# Altium PCB board.PcbDoc (part 2 of 2)
Units mm, origin at the board's own origin, x right, y up, seen from the top; angles counter-clockwise.
Board outline 58 x 79 mm, 2 copper layers (Top Layer, Bottom Layer), stack 0.97 mm thick; 224 components, 193 nets, 673 pads, 83 vias.
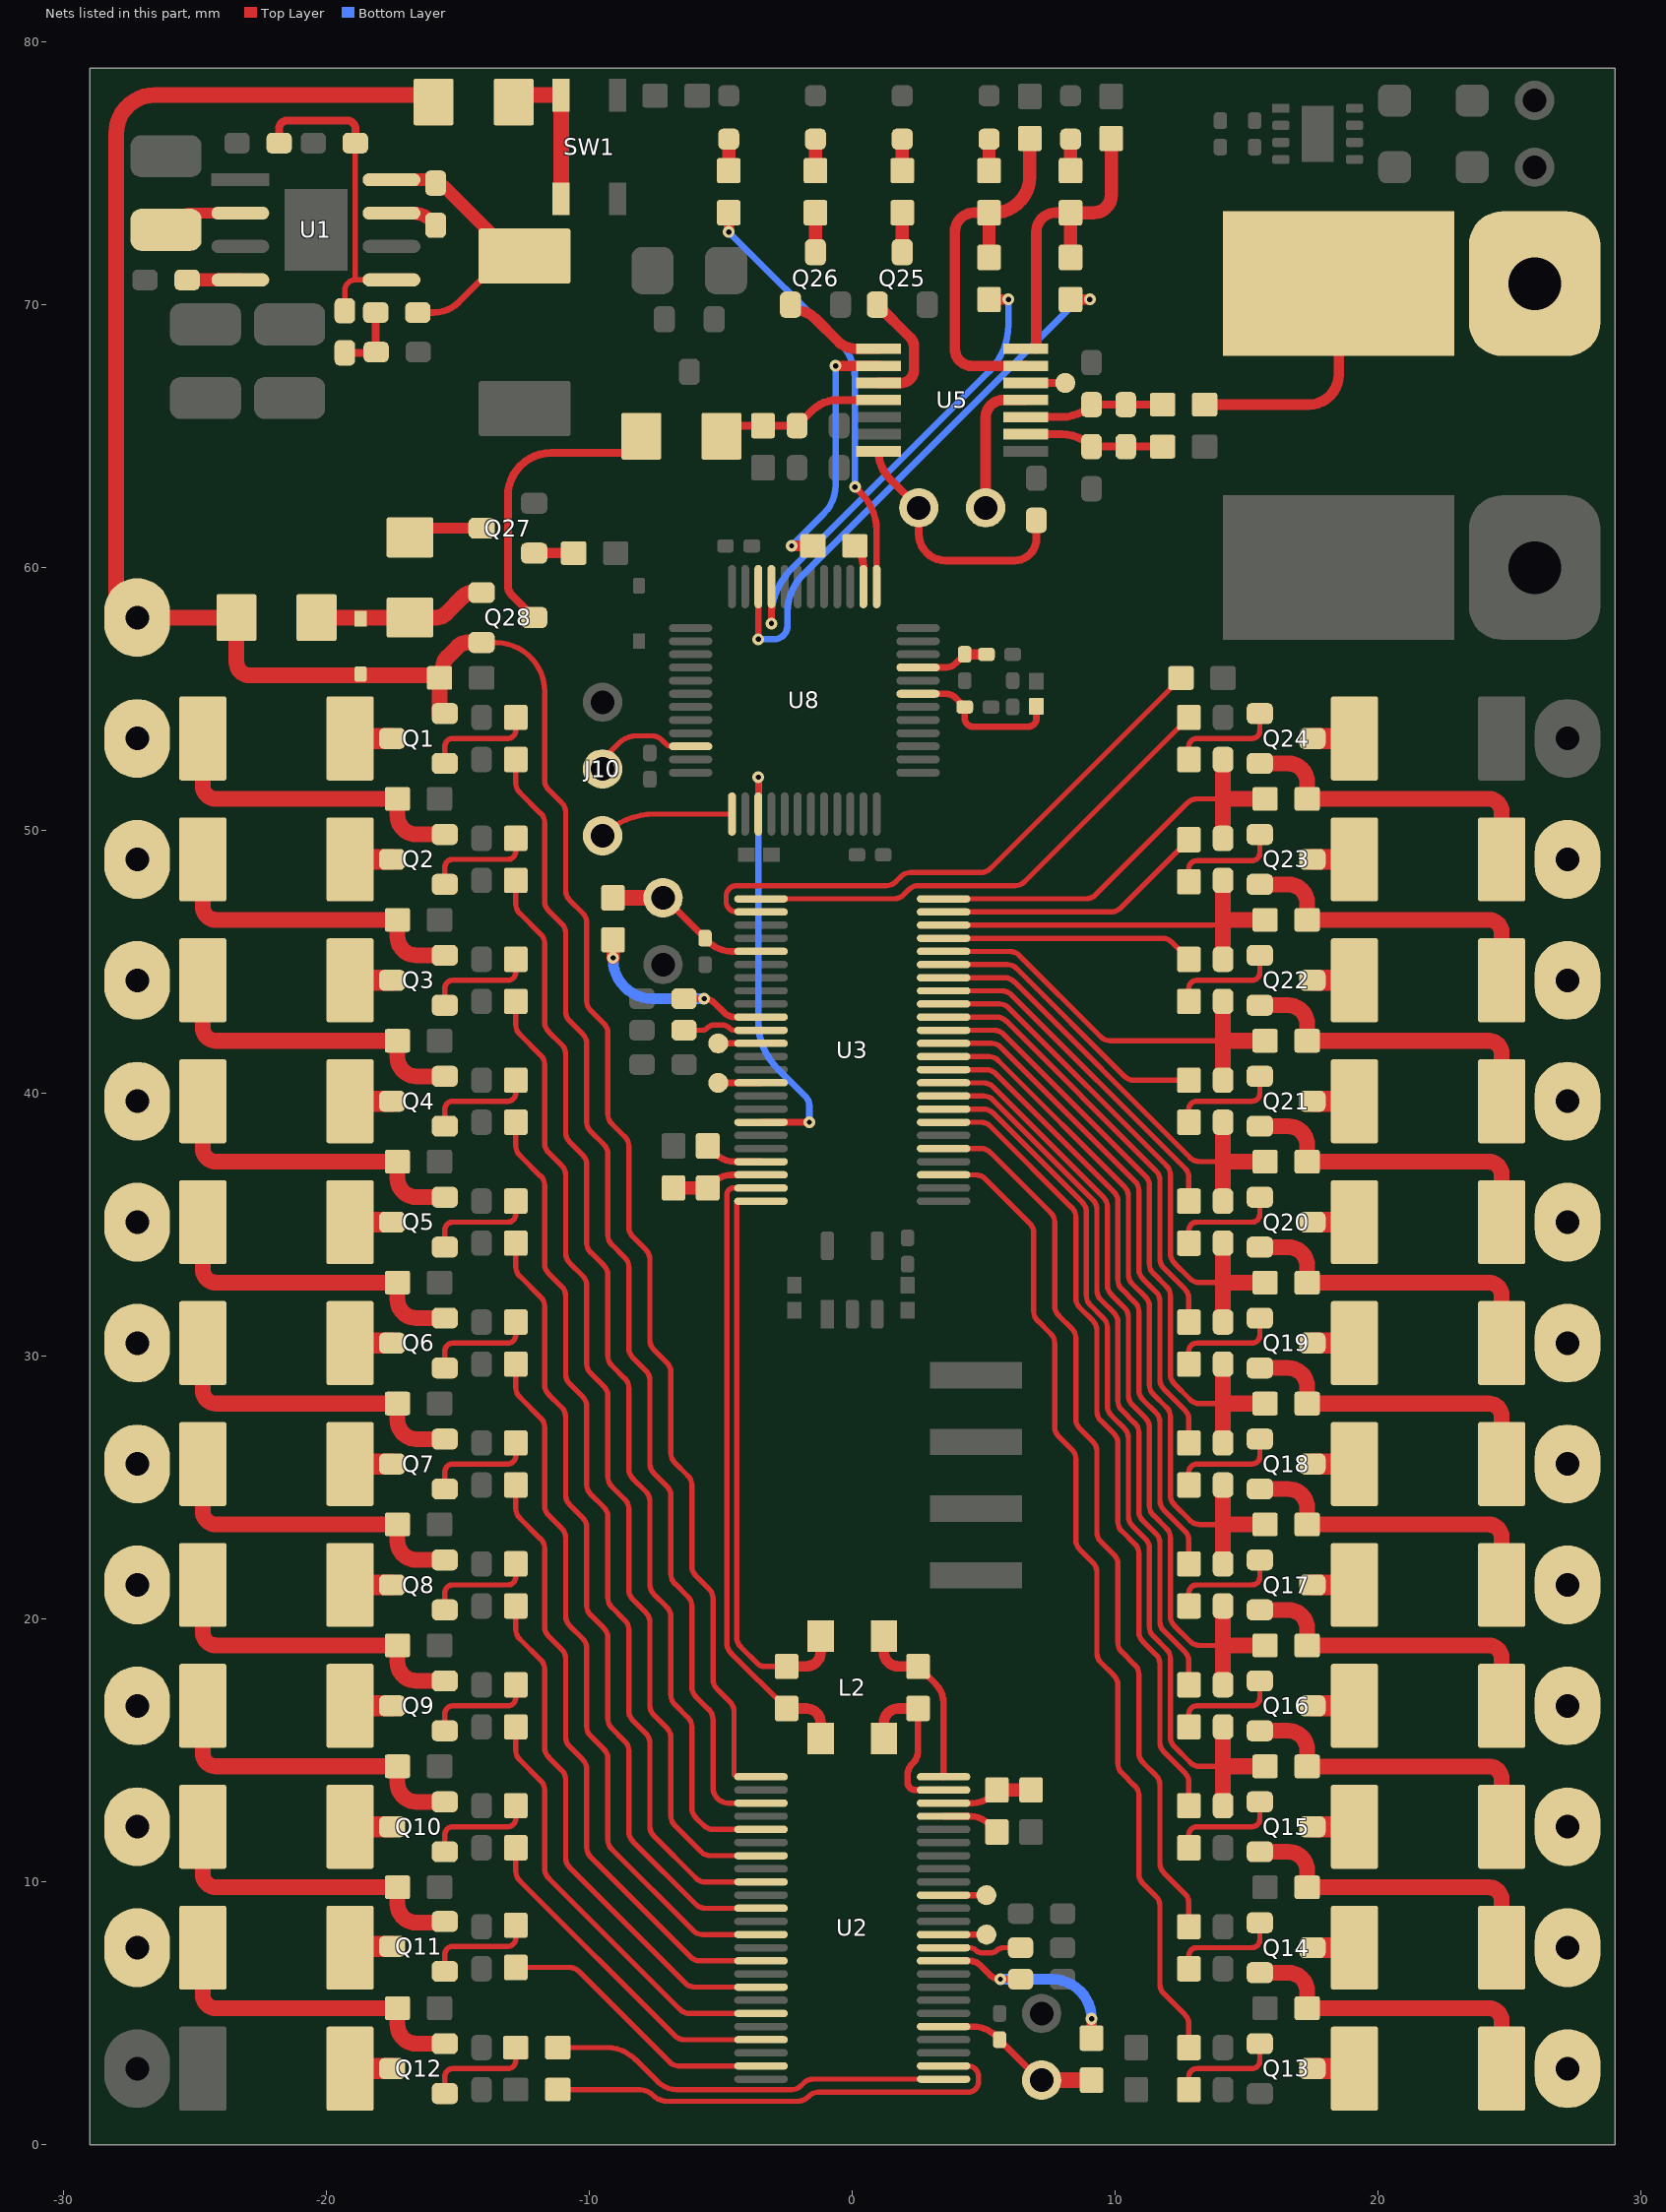
[diagram p2: the nets of this part, all layers, seen from the top]

## Via types
v1: diameter 0.45, hole 0.2, Top Layer to Bottom Layer, tented both sides, 59 vias
v2: diameter 0.6, hole 0.3, Top Layer to Bottom Layer, tented both sides, 24 vias

## Nets (pads, with @x,y where several pads share a name; then routed paths per layer and width w, separated by ;. In a path a pad name is that pad's centre, name@x,y a point inside that pad or via, vN(x,y) a via of type N, cw(c..) or ccw(c..) an arc to the next point about the centre after c; other vN are vias at no path point) (continued)
NetC16_1: C16.1 C17.2 R41.2 U3.8 | length 35.4
  Top Layer w0.2: U3.8@3.47,39.4 4.99,39.4 cw(c4.99,38.892) 5.349,39.251 8.751,35.849 cw(c8.392,35.49) 8.9,35.49 8.9,32.31 ccw(c9.408,32.31) 9.049,31.951 9.551,31.449 cw(c9.192,31.09) 9.7,31.09 ; 9.7,31.09 9.7,28.11 ccw(c10.208,28.11) 9.849,27.751 10.351,27.249 cw(c9.992,26.89) 10.5,26.89 10.5,23.91 ccw(c11.008,23.91) 10.649,23.551 11.151,23.049 cw(c10.792,22.69) 11.3,22.69 11.3,19.71 ccw(c11.808,19.71) 11.449,19.351 11.951,18.849 cw(c11.592,18.49) 12.1,18.49 12.1,15.51 ccw(c12.608,15.51) 12.249,15.151 12.851,14.549 ccw(c13.21,14.908) 13.21,14.4 14.1,14.4
  Top Layer w0.6: C16.1@14.1,12.9 14.1,14.4 ; C17.2@14.1,15.9 14.1,14.4 ; R41.2@15.7,14.4 14.1,14.4
NetC17_1: C17.1 C18.2 R42.2 U3.10 | length 31.8
  Top Layer w0.2: U3.10@3.47,40.4 4.99,40.4 cw(c4.99,39.892) 5.349,40.251 9.551,36.049 cw(c9.192,35.69) 9.7,35.69 ; 9.7,35.69 9.7,32.71 ccw(c10.208,32.71) 9.849,32.351 10.351,31.849 cw(c9.992,31.49) 10.5,31.49 10.5,28.51 ccw(c11.008,28.51) 10.649,28.151 11.151,27.649 cw(c10.792,27.29) 11.3,27.29 11.3,24.31 ccw(c11.808,24.31) 11.449,23.951 11.951,23.449 cw(c11.592,23.09) 12.1,23.09 12.1,20.11 ccw(c12.608,20.11) 12.249,19.751 12.851,19.149 ccw(c13.21,19.508) 13.21,19 14.1,19
  Top Layer w0.6: C17.1@14.1,17.5 14.1,19 ; C18.2@14.1,20.5 14.1,19 ; R42.2@15.7,19 14.1,19
NetC18_1: C18.1 C19.2 R43.2 U3.12 | length 28.4
  Top Layer w0.2: U3.12@3.47,41.4 5.19,41.4 cw(c5.19,40.892) 5.549,41.251 10.351,36.449 cw(c9.992,36.09) 10.5,36.09 10.5,33.11 ccw(c11.008,33.11) 10.649,32.751 11.151,32.249 cw(c10.792,31.89) 11.3,31.89 11.3,28.91 ccw(c11.808,28.91) 11.449,28.551 11.951,28.049 cw(c11.592,27.69) 12.1,27.69 12.1,24.71 ccw(c12.608,24.71) 12.249,24.351 12.851,23.749 ccw(c13.21,24.108) 13.21,23.6 14.1,23.6
  Top Layer w0.6: C18.1@14.1,22.1 14.1,23.6 ; C19.2@14.1,25.1 14.1,23.6 ; R43.2@15.7,23.6 14.1,23.6
NetC19_1: C19.1 C20.2 R44.2 U3.14 | length 25
  Top Layer w0.2: U3.14@3.47,42.4 5.39,42.4 cw(c5.39,41.892) 5.749,42.251 11.151,36.849 cw(c10.792,36.49) 11.3,36.49 11.3,33.51 ccw(c11.808,33.51) 11.449,33.151 11.951,32.649 cw(c11.592,32.29) 12.1,32.29 12.1,29.31 ccw(c12.608,29.31) 12.249,28.951 12.851,28.349 ccw(c13.21,28.708) 13.21,28.2 14.1,28.2
  Top Layer w0.6: C19.1@14.1,26.7 14.1,28.2 R44.2@15.7,28.2 ; 14.1,28.2 C20.2@14.1,29.7
NetC20_1: C20.1 C21.2 R45.2 U3.16 | length 21.5
  Top Layer w0.2: U3.16@3.47,43.4 5.59,43.4 cw(c5.59,42.892) 5.949,43.251 11.951,37.249 cw(c11.592,36.89) 12.1,36.89 12.1,33.91 ccw(c12.608,33.91) 12.249,33.551 12.851,32.949 ccw(c13.21,33.308) 13.21,32.8 14.1,32.8
  Top Layer w0.6: C20.1@14.1,31.3 14.1,32.8 ; C21.2@14.1,34.3 14.1,32.8 ; R45.2@15.7,32.8 14.1,32.8
NetC21_1: C21.1 C22.2 R46.2 U3.18 | length 18.1
  Top Layer w0.2: U3.18@3.47,44.4 5.79,44.4 cw(c5.79,43.892) 6.149,44.251 12.851,37.549 ccw(c13.21,37.908) 13.21,37.4 14.1,37.4
  Top Layer w0.6: C21.1@14.1,35.9 14.1,37.4 ; C22.2@14.1,38.9 14.1,37.4 ; R46.2@15.7,37.4 14.1,37.4
NetC22_1: C22.1 C23.2 R47.2 U3.20 | length 16.6
  Top Layer w0.2: U3.20@3.47,45.4 5.99,45.4 cw(c5.99,44.892) 6.349,45.251 9.451,42.149 ccw(c9.81,42.508) 9.81,42 14.1,42
  Top Layer w0.6: C22.1@14.1,40.5 14.1,42 ; C23.2@14.1,43.5 14.1,42 ; R47.2@15.7,42 14.1,42
NetC23_1: C23.1 C24.2 R48.2 U3.22 | length 15.2
  Top Layer w0.2: U3.22@3.47,46.4 13.69,46.4 ccw(c13.69,46.908) 14.049,46.549
  Top Layer w0.6: C23.1@14.1,45.1 14.1,46.6 ; C24.2@14.1,48.1 14.1,46.6 ; R48.2@15.7,46.6 14.1,46.6
NetC24_1: C24.1 C25.2 R49.2 U3.24 | length 16.8
  Top Layer w0.2: U3.24@3.47,47.4 8.89,47.4 ccw(c8.89,47.908) 9.249,47.549 12.751,51.051 cw(c13.11,50.692) 13.11,51.2 14.1,51.2
  Top Layer w0.6: C24.1@14.1,49.7 14.1,51.2 ; C25.2@14.1,52.7 14.1,51.2 ; R49.2@15.7,51.2 14.1,51.2
NetC26_1: C26.1 U1.7 | length 1.8
  Top Layer w0.5: U1.7@-17.525,73.485 -16.714,73.485 cw(c-16.714,72.494) -16.013,73.195 C26.1@-15.844,73.025
NetC26_2: C26.2 L1.1 R76.1 U1.8 | length 9.4
  Top Layer w0.25: R76.1@-16.525,69.7 -15.937,69.7 ccw(c-15.937,71.082) -14.96,70.105 L1.1@-13.276,71.789
  Top Layer w0.5: U1.8@-17.525,74.755 -16.202,74.755 cw(c-16.202,73.764) -15.501,74.465 L1.1@-13.177,72.14
NetC27_1: C27.1 C28.2 R76.2 | length 2.7
  Top Layer w0.3: C28.2@-19.3,68.169 -18.194,68.169 ccw(c-18.194,68.238) C27.1@-18.125,68.238 ; R76.2@-18.125,69.7 C27.1@-18.125,68.238 ; C27.1@-18.109,68.2 cw(c-18.071,68.238) C27.1@-18.125,68.238
NetC28_1: C28.1 R77.2 R78.1 U1.5 | length 12.3
  Top Layer w0.2: C28.1@-19.3,69.769 -19.3,70.545 cw(c-18.9,70.545) -18.9,70.945 ; R78.1@-18.9,76.15 -18.9,70.945 ; U1.5@-17.525,70.945 -18.9,70.945
  Top Layer w0.3: R77.2@-21.8,76.15 -21.8,76.7 cw(c-21.5,76.7) -21.5,77 -19.2,77 cw(c-19.2,76.7) -18.9,76.7 R78.1@-18.9,76.15
NetC32_2: C32.2 R93.1 U2.34 | length 8.2
  Top Layer w0.25: U2.34@3.47,7 4.455,7 cw(c4.455,6.409) 4.873,6.827 5.236,6.464 ccw(c5.631,6.859) v1(5.631,6.3) C32.2@6.4,6.3
  Top Layer w0.4: R93.1@9.1,4.06 v1(9.1,4.795)
  Bottom Layer w0.4: v1(5.631,6.3) 7.595,6.3 cw(c7.595,4.795) v1(9.1,4.795)
NetC33_2: C33.2 R94.1 U3.34 | length 8.2
  Top Layer w0.25: C33.2@-6.4,43.6 v1(-5.631,43.6) cw(c-5.631,43.041) -5.236,43.436 -4.873,43.073 ccw(c-4.455,43.491) -4.455,42.9 U3.34@-3.47,42.9
  Top Layer w0.5: v1(-9.1,45.154) R94.1@-9.1,45.84
  Bottom Layer w0.4: v1@-9.1,45.105 ccw(c-7.595,45.105) -7.595,43.6 v1(-5.631,43.6)
NetC34_2: C34.2 U2.35 | length 3
  Top Layer w0.2: U2.35@3.47,7.5 4.459,7.5 cw(c4.459,7.159) 4.7,7.4 ccw(c4.941,7.641) 4.941,7.3 5.259,7.3 ccw(c5.259,7.641) 5.5,7.4 cw(c5.741,7.159) 5.741,7.5 C34.2@6.4,7.5
NetC35_2: C35.2 U3.35 | length 3
  Top Layer w0.2: C35.2@-6.4,42.4 -5.741,42.4 ccw(c-5.741,42.741) -5.5,42.5 cw(c-5.259,42.259) -5.259,42.6 -4.941,42.6 cw(c-4.941,42.259) -4.7,42.5 ccw(c-4.459,42.741) -4.459,42.4 U3.35@-3.47,42.4
NetC38_2: C38.2 J5.1 R93.2 U2.29 | length 6.4
  Top Layer w0.25: U2.29@3.47,4.5 4.581,4.5 cw(c4.581,3.248) 5.467,4.133 C38.2@5.6,4 7.098,2.502 ccw(c7.2,2.605) J5.1@7.2,2.46
  Top Layer w0.6: J5.1@7.2,2.46 R93.2@9.1,2.46
NetC39_2: C39.2 J6.1 R94.2 U3.29 | length 6.4
  Top Layer w0.25: J6.1@-7.2,47.44 cw(c-7.2,47.295) -7.098,47.398 C39.2@-5.6,45.9 -5.467,45.767 ccw(c-4.581,46.652) -4.581,45.4 U3.29@-3.47,45.4
  Top Layer w0.6: R94.2@-9.1,47.44 J6.1@-7.2,47.44
NetC42_2: C42.2 C43.2 R102.2 U5.10 | length 5.3
  Top Layer w0.3: U5.10@6.6,65.725 7.953,65.725 ccw(c7.953,67.347) C42.2@9.1,66.2 C43.2@10.4,66.2 R102.2@11.8,66.2
NetC43_1: C43.1 C44.2 R103.2 U5.9 | length 5.3
  Top Layer w0.3: U5.9@6.6,65.075 7.953,65.075 cw(c7.953,63.453) C44.2@9.1,64.6 C43.1@10.4,64.6 R103.2@11.8,64.6
NetC47_1: C47.1 R107.1 R108.2 U5.4 | length 6.5
  Top Layer w0.3: R107.1@-4.976,65 -4.725,65.251 cw(c-4.365,64.892) -4.365,65.4 R108.2@-3.4,65.4 C47.1@-2.1,65.4 -1.527,65.973 cw(c-0.557,65.003) -0.557,66.375 U5.4@1,66.375
NetC52_2: C52.2 R110.2 U8.7 | length 5.9
  Top Layer w0.25: U8.7@2.5,55.2 3.565,55.2 cw(c3.565,54.692) 3.924,55.051 C52.2@4.275,54.7 4.275,54.266 ccw(c4.591,54.266) 4.591,53.95 6.7,53.95 ccw(c6.7,54.25) 7,54.25 R110.2@7,54.724
NetC53_2: C53.2 L3.2 U8.9 | length 2.8
  Top Layer w0.25: U8.9@2.5,56.2 3.565,56.2 ccw(c3.565,56.708) 3.924,56.349 C53.2@4.275,56.7
  Top Layer w0.4: C53.2@4.275,56.7 L3.2@5.099,56.7
NetD1_2: D1.2 R84.2 | length 1.2
  Top Layer w0.5: R84.2@5.2,75.1 D1.2@5.2,76.3
NetD2_2: D2.2 R89.2 | length 1.2
  Top Layer w0.5: R89.2@8.3,75.1 D2.2@8.3,76.3
NetD3_2: D3.2 R92.2 | length 1.2
  Top Layer w0.5: R92.2@1.9,75.1 D3.2@1.9,76.3
NetD4_2: D4.2 R95.2 | length 1.2
  Top Layer w0.5: R95.2@-1.4,75.1 D4.2@-1.4,76.3
NetD6_1: D6.1 R106.1 | length 1.2
  Top Layer w0.5: R106.1@-4.7,75.1 D6.1@-4.7,76.3
NetJ1_1: J1.1 U2.39 | length 1.6
  Top Layer w0.25: U2.39@3.47,9.5 J1.1@5.1,9.5
NetJ2_1: J2.1 U2.36 | length 1.6
  Top Layer w0.25: U2.36@3.47,8 J2.1@5.1,8
NetJ3_1: J3.1 U3.39 | length 1.6
  Top Layer w0.25: J3.1@-5.1,40.4 U3.39@-3.47,40.4
NetJ4_1: J4.1 U3.36 | length 1.6
  Top Layer w0.25: J4.1@-5.1,41.9 U3.36@-3.47,41.9
NetJ7_1: J7.1 U5.12 | length 1.5
  Top Layer w0.3: U5.12@6.6,67.025 J7.1@8.1,67.025
NetJ8_2: J8.2 U5.11 | length 5.3
  Top Layer w0.4: J8.2@5.07,62.275 5.07,65.7 cw(c5.745,65.7) 5.745,66.375 U5.11@6.6,66.375
NetL2_1: L2.1 R97.1 U3.48 | length 22.2
  Top Layer w0.2: U3.48@-3.47,35.9 -4.4,35.9 -4.4,19.31 ccw(c-3.892,19.31) -4.251,18.951 -3.6,18.3 ccw(c-3.36,18.54) -3.36,18.2 R97.1@-2.5,18.2
  Top Layer w0.4: R97.1@-2.5,18.2 -1.759,18.2 ccw(c-1.759,18.759) -1.2,18.759 L2.1@-1.2,19.35
NetL2_2: L2.2 R97.2 U3.47 | length 24.1
  Top Layer w0.2: U3.47@-3.47,36.4 -4.52,36.4 ccw(c-4.52,36.149) -4.771,36.149 -4.771,19.082 ccw(c-4.263,19.082) -4.622,18.723 R97.2@-2.5,16.6
  Top Layer w0.4: R97.2@-2.5,16.6 -1.759,16.6 cw(c-1.759,16.041) -1.2,16.041 L2.2@-1.2,15.45
NetL2_3: L2.3 R96.2 U2.47 | length 7.8
  Top Layer w0.25: 2.5,15.657 2.5,14.997 ; R96.2@2.5,16.6 2.5,14.997 ; U2.47@3.97,13.5 U2.47@3.47,13.5 2.4,13.5 cw(c2.4,13.8) 2.1,13.8 2.1,14.057 cw(c2.721,14.057) 2.281,14.496 2.3,14.514 ccw(c1.817,14.997) 2.5,14.997
  Top Layer w0.4: L2.3@1.2,15.45 1.2,16.041 cw(c1.759,16.041) 1.759,16.6 R96.2@2.5,16.6
NetL2_4: L2.4 R96.1 U2.48 | length 6.8
  Top Layer w0.25: R96.1@2.5,18.2 3.172,17.528 cw(c2.454,16.81) 3.47,16.81 U2.48@3.47,14
  Top Layer w0.4: L2.4@1.2,19.35 1.2,18.759 ccw(c1.759,18.759) 1.759,18.2 R96.1@2.5,18.2
NetQ1_1: Q1.1 R50.1 | length 4.2
  Top Layer w0.2: Q1.1@-15.5,52.55 -15.5,53.195 cw(c-15.195,53.195) -15.195,53.5 -13.105,53.5 ccw(c-13.105,53.805) -12.8,53.805 R50.1@-12.8,54.3
NetQ1_3: Q1.3 R1.1 | length 1.6
  Top Layer w0.8: R1.1@-19.1,53.5 Q1.3@-17.5,53.5
NetQ2_1: Q2.1 R51.1 | length 4.2
  Top Layer w0.2: Q2.1@-15.5,47.95 -15.5,48.595 cw(c-15.195,48.595) -15.195,48.9 -13.105,48.9 ccw(c-13.105,49.205) -12.8,49.205 R51.1@-12.8,49.7
NetQ2_2: pad.*@-27.2,53.5 Q2.2 R1.2 R27.1 | length 12.3
  Top Layer w0.6: R1.2@-24.7,53.5 -24.7,51.699 ccw(c-24.201,51.699) -24.201,51.2 R27.1@-17.3,51.2 -17.3,50.575 ccw(c-16.575,50.575) -16.575,49.85 Q2.2@-15.5,49.85
NetQ2_3: Q2.3 R2.1 | length 1.6
  Top Layer w0.8: R2.1@-19.1,48.9 Q2.3@-17.5,48.9
NetQ3_1: Q3.1 R52.1 | length 4.2
  Top Layer w0.2: Q3.1@-15.5,43.35 -15.5,43.995 cw(c-15.195,43.995) -15.195,44.3 -13.105,44.3 ccw(c-13.105,44.605) -12.8,44.605 R52.1@-12.8,45.1
NetQ3_2: pad.*@-27.2,48.9 Q3.2 R2.2 R28.1 | length 12.3
  Top Layer w0.6: R2.2@-24.7,48.9 -24.7,47.099 ccw(c-24.201,47.099) -24.201,46.6 R28.1@-17.3,46.6 -17.3,45.975 ccw(c-16.575,45.975) -16.575,45.25 Q3.2@-15.5,45.25
NetQ3_3: Q3.3 R3.1 | length 1.6
  Top Layer w0.8: R3.1@-19.1,44.3 Q3.3@-17.5,44.3
NetQ4_1: Q4.1 R53.1 | length 4.2
  Top Layer w0.2: Q4.1@-15.5,38.75 -15.5,39.395 cw(c-15.195,39.395) -15.195,39.7 -13.105,39.7 ccw(c-13.105,40.005) -12.8,40.005 R53.1@-12.8,40.5
NetQ4_2: pad.*@-27.2,44.3 Q4.2 R3.2 R29.1 | length 12.3
  Top Layer w0.6: R3.2@-24.7,44.3 -24.7,42.499 ccw(c-24.201,42.499) -24.201,42 R29.1@-17.3,42 -17.3,41.375 ccw(c-16.575,41.375) -16.575,40.65 Q4.2@-15.5,40.65
NetQ4_3: Q4.3 R4.1 | length 1.6
  Top Layer w0.8: R4.1@-19.1,39.7 Q4.3@-17.5,39.7
NetQ5_1: Q5.1 R54.1 | length 4.2
  Top Layer w0.2: Q5.1@-15.5,34.15 -15.5,34.795 cw(c-15.195,34.795) -15.195,35.1 -13.105,35.1 ccw(c-13.105,35.405) -12.8,35.405 R54.1@-12.8,35.9
NetQ5_2: pad.*@-27.2,39.7 Q5.2 R4.2 R30.1 | length 12.3
  Top Layer w0.6: R4.2@-24.7,39.7 -24.7,37.899 ccw(c-24.201,37.899) -24.201,37.4 R30.1@-17.3,37.4 -17.3,36.775 ccw(c-16.575,36.775) -16.575,36.05 Q5.2@-15.5,36.05
NetQ5_3: Q5.3 R5.1 | length 1.6
  Top Layer w0.8: R5.1@-19.1,35.1 Q5.3@-17.5,35.1
NetQ6_1: Q6.1 R55.1 | length 4.2
  Top Layer w0.2: Q6.1@-15.5,29.55 -15.5,30.195 cw(c-15.195,30.195) -15.195,30.5 -13.105,30.5 ccw(c-13.105,30.805) -12.8,30.805 R55.1@-12.8,31.3
NetQ6_2: pad.*@-27.2,35.1 Q6.2 R5.2 R31.1 | length 12.3
  Top Layer w0.6: R5.2@-24.7,35.1 -24.7,33.299 ccw(c-24.201,33.299) -24.201,32.8 R31.1@-17.3,32.8 -17.3,32.175 ccw(c-16.575,32.175) -16.575,31.45 Q6.2@-15.5,31.45
NetQ6_3: Q6.3 R6.1 | length 1.6
  Top Layer w0.8: R6.1@-19.1,30.5 Q6.3@-17.5,30.5
NetQ7_1: Q7.1 R56.1 | length 4.2
  Top Layer w0.2: Q7.1@-15.5,24.95 -15.5,25.595 cw(c-15.195,25.595) -15.195,25.9 -13.105,25.9 ccw(c-13.105,26.205) -12.8,26.205 R56.1@-12.8,26.7
NetQ7_2: pad.*@-27.2,30.5 Q7.2 R6.2 R32.1 | length 12.3
  Top Layer w0.6: R6.2@-24.7,30.5 -24.7,28.699 ccw(c-24.201,28.699) -24.201,28.2 R32.1@-17.3,28.2 -17.3,27.575 ccw(c-16.575,27.575) -16.575,26.85 Q7.2@-15.5,26.85
NetQ7_3: Q7.3 R7.1 | length 1.6
  Top Layer w0.8: R7.1@-19.1,25.9 Q7.3@-17.5,25.9
NetQ8_1: Q8.1 R57.1 | length 4.2
  Top Layer w0.2: Q8.1@-15.5,20.35 -15.5,20.995 cw(c-15.195,20.995) -15.195,21.3 -13.105,21.3 ccw(c-13.105,21.605) -12.8,21.605 R57.1@-12.8,22.1
NetQ8_2: pad.*@-27.2,25.9 Q8.2 R7.2 R33.1 | length 12.3
  Top Layer w0.6: R7.2@-24.7,25.9 -24.7,24.099 ccw(c-24.201,24.099) -24.201,23.6 R33.1@-17.3,23.6 -17.3,22.975 ccw(c-16.575,22.975) -16.575,22.25 Q8.2@-15.5,22.25
NetQ8_3: Q8.3 R8.1 | length 1.6
  Top Layer w0.8: R8.1@-19.1,21.3 Q8.3@-17.5,21.3
NetQ9_1: Q9.1 R58.1 | length 4.2
  Top Layer w0.2: Q9.1@-15.5,15.75 -15.5,16.395 cw(c-15.195,16.395) -15.195,16.7 -13.105,16.7 ccw(c-13.105,17.005) -12.8,17.005 R58.1@-12.8,17.5
NetQ9_2: pad.*@-27.2,21.3 Q9.2 R8.2 R34.1 | length 12.3
  Top Layer w0.6: R8.2@-24.7,21.3 -24.7,19.499 ccw(c-24.201,19.499) -24.201,19 R34.1@-17.3,19 -17.3,18.375 ccw(c-16.575,18.375) -16.575,17.65 Q9.2@-15.5,17.65
NetQ9_3: Q9.3 R9.1 | length 1.6
  Top Layer w0.8: R9.1@-19.1,16.7 Q9.3@-17.5,16.7
NetQ10_1: Q10.1 R59.1 | length 4.2
  Top Layer w0.2: Q10.1@-15.5,11.15 -15.5,11.795 cw(c-15.195,11.795) -15.195,12.1 -13.105,12.1 ccw(c-13.105,12.405) -12.8,12.405 R59.1@-12.8,12.9
NetQ10_2: pad.*@-27.2,16.7 Q10.2 R9.2 R35.1 | length 12.3
  Top Layer w0.6: R9.2@-24.7,16.7 -24.7,14.899 ccw(c-24.201,14.899) -24.201,14.4 R35.1@-17.3,14.4 -17.3,13.775 ccw(c-16.575,13.775) -16.575,13.05 Q10.2@-15.5,13.05
NetQ10_3: Q10.3 R10.1 | length 1.6
  Top Layer w0.8: R10.1@-19.1,12.1 Q10.3@-17.5,12.1
NetQ11_1: Q11.1 R60.1 | length 4.2
  Top Layer w0.2: Q11.1@-15.5,6.6 -15.5,7.245 cw(c-15.195,7.245) -15.195,7.55 -13.105,7.55 ccw(c-13.105,7.855) -12.8,7.855 R60.1@-12.8,8.35
NetQ11_2: pad.*@-27.2,12.1 Q11.2 R10.2 R36.1 | length 12.3
  Top Layer w0.6: R10.2@-24.7,12.1 -24.7,10.299 ccw(c-24.201,10.299) -24.201,9.8 R36.1@-17.3,9.8 -17.3,9.175 ccw(c-16.575,9.175) -16.575,8.45 Q11.2@-15.5,8.45
NetQ11_3: Q11.3 R11.1 | length 1.6
  Top Layer w0.8: R11.1@-19.1,7.55 Q11.3@-17.5,7.55
NetQ12_1: Q12.1 R61.1 | length 4.2
  Top Layer w0.2: Q12.1@-15.5,1.95 -15.5,2.595 cw(c-15.195,2.595) -15.195,2.9 -13.105,2.9 ccw(c-13.105,3.205) -12.8,3.205 R61.1@-12.8,3.7
NetQ12_2: pad.*@-27.2,7.5 Q12.2 R11.2 R37.1 | length 12.3
  Top Layer w0.6: R11.2@-24.7,7.5 -24.7,5.699 ccw(c-24.201,5.699) -24.201,5.2 R37.1@-17.3,5.2 -17.3,4.575 ccw(c-16.575,4.575) -16.575,3.85 Q12.2@-15.5,3.85
NetQ12_3: Q12.3 R12.1 | length 1.6
  Top Layer w0.8: R12.1@-19.1,2.9 Q12.3@-17.5,2.9
NetQ13_1: Q13.1 R63.1 | length 4.7
  Top Layer w0.2: Q13.1@15.5,3.85 15.5,3.205 cw(c15.195,3.205) 15.195,2.9 13.105,2.9 ccw(c13.105,2.595) 12.8,2.595 ; 12.8,2.595 R63.1@12.8,2.1 12.8,2.595
NetQ13_3: Q13.3 R13.1 | length 1.6
  Top Layer w0.8: Q13.3@17.5,2.9 R13.1@19.1,2.9
NetQ14_1: Q14.1 R64.1 | length 4.2
  Top Layer w0.2: R64.1@12.8,6.7 12.8,7.195 cw(c13.105,7.195) 13.105,7.5 15.195,7.5 ccw(c15.195,7.805) 15.5,7.805 Q14.1@15.5,8.45
NetQ14_2: pad.*@27.2,2.9 Q14.2 R13.2 R39.1 | length 12.3
  Top Layer w0.6: Q14.2@15.5,6.55 16.575,6.55 cw(c16.575,5.825) 17.3,5.825 R39.1@17.3,5.2 24.201,5.2 cw(c24.201,4.701) 24.7,4.701 R13.2@24.7,2.9
NetQ14_3: Q14.3 R14.1 | length 1.6
  Top Layer w0.8: Q14.3@17.5,7.5 R14.1@19.1,7.5
NetQ15_1: Q15.1 R65.1 | length 4.2
  Top Layer w0.2: R65.1@12.8,11.3 12.8,11.795 cw(c13.105,11.795) 13.105,12.1 15.195,12.1 ccw(c15.195,12.405) 15.5,12.405 Q15.1@15.5,13.05
NetQ15_2: pad.*@27.2,7.5 Q15.2 R14.2 R40.1 | length 12.3
  Top Layer w0.6: Q15.2@15.5,11.15 16.575,11.15 cw(c16.575,10.425) 17.3,10.425 R40.1@17.3,9.8 24.201,9.8 cw(c24.201,9.301) 24.7,9.301 R14.2@24.7,7.5
NetQ15_3: Q15.3 R15.1 | length 1.6
  Top Layer w0.8: Q15.3@17.5,12.1 R15.1@19.1,12.1
NetQ16_1: Q16.1 R66.1 | length 4.2
  Top Layer w0.2: R66.1@12.8,15.9 12.8,16.395 cw(c13.105,16.395) 13.105,16.7 15.195,16.7 ccw(c15.195,17.005) 15.5,17.005 Q16.1@15.5,17.65
NetQ16_2: pad.*@27.2,12.1 Q16.2 R15.2 R41.1 | length 12.3
  Top Layer w0.6: Q16.2@15.5,15.75 16.575,15.75 cw(c16.575,15.025) 17.3,15.025 R41.1@17.3,14.4 24.201,14.4 cw(c24.201,13.901) 24.7,13.901 R15.2@24.7,12.1
NetQ16_3: Q16.3 R16.1 | length 1.6
  Top Layer w0.8: Q16.3@17.5,16.7 R16.1@19.1,16.7
NetQ17_1: Q17.1 R67.1 | length 4.2
  Top Layer w0.2: R67.1@12.8,20.5 12.8,20.995 cw(c13.105,20.995) 13.105,21.3 15.195,21.3 ccw(c15.195,21.605) 15.5,21.605 Q17.1@15.5,22.25
NetQ17_2: pad.*@27.2,16.7 Q17.2 R16.2 R42.1 | length 12.3
  Top Layer w0.6: Q17.2@15.5,20.35 16.575,20.35 cw(c16.575,19.625) 17.3,19.625 R42.1@17.3,19 24.201,19 cw(c24.201,18.501) 24.7,18.501 R16.2@24.7,16.7
NetQ17_3: Q17.3 R17.1 | length 1.6
  Top Layer w0.8: Q17.3@17.5,21.3 R17.1@19.1,21.3
NetQ18_1: Q18.1 R68.1 | length 4.2
  Top Layer w0.2: R68.1@12.8,25.1 12.8,25.595 cw(c13.105,25.595) 13.105,25.9 15.195,25.9 ccw(c15.195,26.205) 15.5,26.205 Q18.1@15.5,26.85
NetQ18_2: pad.*@27.2,21.3 Q18.2 R17.2 R43.1 | length 12.3
  Top Layer w0.6: Q18.2@15.5,24.95 16.575,24.95 cw(c16.575,24.225) 17.3,24.225 R43.1@17.3,23.6 24.201,23.6 cw(c24.201,23.101) 24.7,23.101 R17.2@24.7,21.3
NetQ18_3: Q18.3 R18.1 | length 1.6
  Top Layer w0.8: Q18.3@17.5,25.9 R18.1@19.1,25.9
NetQ19_1: Q19.1 R69.1 | length 4.2
  Top Layer w0.2: R69.1@12.8,29.7 12.8,30.195 cw(c13.105,30.195) 13.105,30.5 15.195,30.5 ccw(c15.195,30.805) 15.5,30.805 Q19.1@15.5,31.45
NetQ19_2: pad.*@27.2,25.9 Q19.2 R18.2 R44.1 | length 12.3
  Top Layer w0.6: Q19.2@15.5,29.55 16.575,29.55 cw(c16.575,28.825) 17.3,28.825 R44.1@17.3,28.2 24.201,28.2 cw(c24.201,27.701) 24.7,27.701 R18.2@24.7,25.9
NetQ19_3: Q19.3 R19.1 | length 1.6
  Top Layer w0.8: Q19.3@17.5,30.5 R19.1@19.1,30.5
NetQ20_1: Q20.1 R70.1 | length 4.2
  Top Layer w0.2: R70.1@12.8,34.3 12.8,34.795 cw(c13.105,34.795) 13.105,35.1 15.195,35.1 ccw(c15.195,35.405) 15.5,35.405 Q20.1@15.5,36.05
NetQ20_2: pad.*@27.2,30.5 Q20.2 R19.2 R45.1 | length 12.3
  Top Layer w0.6: Q20.2@15.5,34.15 16.575,34.15 cw(c16.575,33.425) 17.3,33.425 R45.1@17.3,32.8 24.201,32.8 cw(c24.201,32.301) 24.7,32.301 R19.2@24.7,30.5
NetQ20_3: Q20.3 R20.1 | length 1.6
  Top Layer w0.8: Q20.3@17.5,35.1 R20.1@19.1,35.1
NetQ21_1: Q21.1 R71.1 | length 4.2
  Top Layer w0.2: R71.1@12.8,38.9 12.8,39.395 cw(c13.105,39.395) 13.105,39.7 15.195,39.7 ccw(c15.195,40.005) 15.5,40.005 Q21.1@15.5,40.65
NetQ21_2: pad.*@27.2,35.1 Q21.2 R20.2 R46.1 | length 12.3
  Top Layer w0.6: Q21.2@15.5,38.75 16.575,38.75 cw(c16.575,38.025) 17.3,38.025 R46.1@17.3,37.4 24.201,37.4 cw(c24.201,36.901) 24.7,36.901 R20.2@24.7,35.1
NetQ21_3: Q21.3 R21.1 | length 1.6
  Top Layer w0.8: Q21.3@17.5,39.7 R21.1@19.1,39.7
NetQ22_1: Q22.1 R72.1 | length 4.2
  Top Layer w0.2: R72.1@12.8,43.5 12.8,43.995 cw(c13.105,43.995) 13.105,44.3 15.195,44.3 ccw(c15.195,44.605) 15.5,44.605 Q22.1@15.5,45.25
NetQ22_2: pad.*@27.2,39.7 Q22.2 R21.2 R47.1 | length 12.3
  Top Layer w0.6: Q22.2@15.5,43.35 16.575,43.35 cw(c16.575,42.625) 17.3,42.625 R47.1@17.3,42 24.201,42 cw(c24.201,41.501) 24.7,41.501 R21.2@24.7,39.7
NetQ22_3: Q22.3 R22.1 | length 1.6
  Top Layer w0.8: Q22.3@17.5,44.3 R22.1@19.1,44.3
NetQ23_1: Q23.1 R73.1 | length 4.2
  Top Layer w0.2: R73.1@12.8,48.05 12.8,48.545 cw(c13.105,48.545) 13.105,48.85 15.195,48.85 ccw(c15.195,49.155) 15.5,49.155 Q23.1@15.5,49.8
NetQ23_2: pad.*@27.2,44.3 Q23.2 R22.2 R48.1 | length 12.3
  Top Layer w0.6: Q23.2@15.5,47.95 16.575,47.95 cw(c16.575,47.225) 17.3,47.225 R48.1@17.3,46.6 24.201,46.6 cw(c24.201,46.101) 24.7,46.101 R22.2@24.7,44.3
NetQ23_3: Q23.3 R23.1 | length 1.6
  Top Layer w0.8: Q23.3@17.5,48.9 R23.1@19.1,48.9
NetQ24_1: Q24.1 R74.1 | length 4.2
  Top Layer w0.2: R74.1@12.8,52.7 12.8,53.195 cw(c13.105,53.195) 13.105,53.5 15.195,53.5 ccw(c15.195,53.805) 15.5,53.805 Q24.1@15.5,54.45
NetQ24_2: pad.*@27.2,48.9 Q24.2 R23.2 R49.1 | length 12.3
  Top Layer w0.6: Q24.2@15.5,52.55 16.575,52.55 cw(c16.575,51.825) 17.3,51.825 R49.1@17.3,51.2 24.201,51.2 cw(c24.201,50.701) 24.7,50.701 R23.2@24.7,48.9
NetQ24_3: Q24.3 R24.1 | length 1.6
  Top Layer w0.8: Q24.3@17.5,53.5 R24.1@19.1,53.5
NetQ25_1: Q25.1 U5.3 | length 4.7
  Top Layer w0.4: Q25.1@0.95,70 2.212,68.738 cw(c1.899,68.426) 2.341,68.426 2.341,67.511 cw(c1.855,67.511) 1.855,67.025 U5.3@1,67.025
NetQ25_3: Q25.3 R92.1 | length 1.5
  Top Layer w0.5: Q25.3@1.9,72 R92.1@1.9,73.5
NetQ26_1: Q26.1 U5.1 | length 4
  Top Layer w0.4: Q26.1@-2.35,70 -2.166,69.816 cw(c-2.197,69.785) -2.154,69.785 cw(c-2.154,68.731) -1.408,69.477 -0.522,68.591 ccw(c0.121,69.235) 0.121,68.325 U5.1@1,68.325
NetQ26_3: Q26.3 R95.1 | length 1.5
  Top Layer w0.5: Q26.3@-1.4,72 R95.1@-1.4,73.5
NetQ27_1: Q27.1 R100.1 | length 1.5
  Top Layer w0.4: Q27.1@-12.1,60.55 R100.1@-10.6,60.55
NetQ27_3: Q27.3 R105.1 | length 2.9
  Top Layer w0.4: R105.1@-16.824,61.148 cw(c-16.472,61.148) -16.472,61.5 Q27.3@-14.1,61.5
NetQ28_1: Q28.1 R104.1 R105.2 U?.1 | length 6.6
  Top Layer w0.6: R104.1@-20.376,58.1 R105.2@-16.824,58.1 -15.81,58.1 ccw(c-15.81,58.608) -15.451,58.249 -14.799,58.901 cw(c-14.44,58.542) -14.44,59.05 Q28.1@-14.1,59.05
NetQ28_3: Q28.3 R107.2 | length 11.3
  Top Layer w0.3: Q28.3@-12.1,58.1 -12.951,58.951 cw(c-12.592,59.31) -13.1,59.31 -13.1,62.712 cw(c-11.444,62.712) -11.444,64.367 -8.657,64.367 R107.2@-8.024,65
NetR25_1: R25.1 U1.4 | length 2
  Top Layer w0.5: R25.1@-25.3,70.945 U1.4@-23.275,70.945
NetR50_2: R50.2 U2.3 | length 44
  Top Layer w0.2: R50.2@-12.8,52.7 -12.8,51.81 ccw(c-12.292,51.81) -12.651,51.451 -11.849,50.649 cw(c-12.208,50.289) -11.7,50.289 -11.7,47.31 ccw(c-11.192,47.31) -11.551,46.951 -11.049,46.449 cw(c-11.408,46.09) -10.9,46.09 -10.9,43.11 ccw(c-10.392,43.11) -10.751,42.751 -10.249,42.249 cw(c-10.608,41.89) -10.1,41.89 -10.1,38.91 ccw(c-9.592,38.91) -9.951,38.551 -9.449,38.049 cw(c-9.808,37.69) -9.3,37.69 -9.3,34.61 ccw(c-8.792,34.61) -9.151,34.251 -8.649,33.749 cw(c-9.008,33.39) -8.5,33.39 -8.5,30.31 ccw(c-7.992,30.31) -8.351,29.951 -7.849,29.449 cw(c-8.208,29.09) -7.7,29.09 -7.7,25.91 ccw(c-7.192,25.91) -7.551,25.551 -7.049,25.049 cw(c-7.408,24.69) -6.9,24.69 -6.9,21.71 ccw(c-6.392,21.71) -6.751,21.351 -6.249,20.849 cw(c-6.608,20.49) -6.1,20.49 -6.1,17.411 ccw(c-5.592,17.41) -5.951,17.051 -5.449,16.549 cw(c-5.808,16.19) -5.3,16.19 -5.3,13.593 ccw(c-4.708,13.593) -4.708,13 U2.3@-3.47,13
NetR51_2: R51.2 U2.5 | length 40.8
  Top Layer w0.2: R51.2@-12.8,48.1 -12.8,47.21 ccw(c-12.292,47.21) -12.651,46.851 -11.849,46.049 cw(c-12.208,45.689) -11.7,45.689 -11.7,42.71 ccw(c-11.192,42.71) -11.551,42.351 -11.049,41.849 cw(c-11.408,41.49) -10.9,41.49 -10.9,38.51 ccw(c-10.392,38.51) -10.751,38.151 -10.249,37.649 cw(c-10.608,37.29) -10.1,37.29 -10.1,34.31 ccw(c-9.592,34.31) -9.951,33.951 -9.449,33.449 cw(c-9.808,33.09) -9.3,33.09 -9.3,30.01 ccw(c-8.792,30.01) -9.151,29.651 -8.649,29.149 cw(c-9.008,28.79) -8.5,28.79 -8.5,25.71 ccw(c-7.992,25.71) -8.351,25.351 -7.849,24.849 cw(c-8.208,24.49) -7.7,24.49 -7.7,21.31 ccw(c-7.192,21.31) -7.551,20.951 -7.049,20.449 cw(c-7.408,20.09) -6.9,20.09 -6.9,17.111 ccw(c-6.392,17.11) -6.751,16.751 -6.249,16.249 cw(c-6.608,15.89) -6.1,15.89 -6.1,12.811 ccw(c-5.592,12.81) -5.951,12.451 -5.649,12.149 ccw(c-5.29,12.508) -5.29,12 U2.5@-3.47,12
NetR52_2: R52.2 U2.7 | length 37.3
  Top Layer w0.2: R52.2@-12.8,43.5 -12.8,42.61 ccw(c-12.292,42.61) -12.651,42.251 -11.849,41.449 cw(c-12.208,41.089) -11.7,41.089 -11.7,38.11 ccw(c-11.192,38.11) -11.551,37.751 -11.049,37.249 cw(c-11.408,36.89) -10.9,36.89 -10.9,33.91 ccw(c-10.392,33.91) -10.751,33.551 -10.249,33.049 cw(c-10.608,32.69) -10.1,32.69 -10.1,29.71 ccw(c-9.592,29.71) -9.951,29.351 -9.449,28.849 cw(c-9.808,28.49) -9.3,28.49 -9.3,25.41 ccw(c-8.792,25.41) -9.151,25.051 -8.649,24.549 cw(c-9.008,24.19) -8.5,24.19 -8.5,21.11 ccw(c-7.992,21.11) -8.351,20.751 -7.849,20.249 cw(c-8.208,19.89) -7.7,19.89 -7.7,16.711 ccw(c-7.192,16.71) -7.551,16.351 -7.049,15.849 cw(c-7.408,15.49) -6.9,15.49 -6.9,12.511 ccw(c-6.392,12.51) -6.751,12.151 -5.749,11.149 ccw(c-5.39,11.508) -5.39,11 U2.7@-3.47,11
NetR53_2: R53.2 U2.9 | length 33.8
  Top Layer w0.2: R53.2@-12.8,38.9 -12.8,38.01 ccw(c-12.292,38.01) -12.651,37.651 -11.849,36.849 cw(c-12.208,36.489) -11.7,36.489 -11.7,33.51 ccw(c-11.192,33.51) -11.551,33.151 -11.049,32.649 cw(c-11.408,32.29) -10.9,32.29 -10.9,29.31 ccw(c-10.392,29.31) -10.751,28.951 -10.249,28.449 cw(c-10.608,28.09) -10.1,28.09 -10.1,25.11 ccw(c-9.592,25.11) -9.951,24.751 -9.449,24.249 cw(c-9.808,23.89) -9.3,23.89 -9.3,20.81 ccw(c-8.792,20.81) -9.151,20.451 -8.649,19.949 cw(c-9.008,19.59) -8.5,19.59 -8.5,16.511 ccw(c-7.992,16.51) -8.351,16.151 -7.849,15.649 cw(c-8.208,15.29) -7.7,15.29 -7.7,12.111 ccw(c-7.192,12.11) -7.551,11.751 -5.949,10.149 ccw(c-5.59,10.508) -5.59,10 U2.9@-3.47,10
NetR54_2: R54.2 U2.11 | length 30.3
  Top Layer w0.2: R54.2@-12.8,34.3 -12.8,33.41 ccw(c-12.292,33.41) -12.651,33.051 -11.849,32.249 cw(c-12.208,31.89) -11.7,31.89 -11.7,28.91 ccw(c-11.192,28.91) -11.551,28.551 -11.049,28.049 cw(c-11.408,27.69) -10.9,27.69 -10.9,24.71 ccw(c-10.392,24.71) -10.751,24.351 -10.249,23.849 cw(c-10.608,23.49) -10.1,23.49 -10.1,20.51 ccw(c-9.592,20.51) -9.951,20.151 -9.449,19.649 cw(c-9.808,19.29) -9.3,19.29 -9.3,16.21 ccw(c-8.792,16.21) -9.151,15.851 -8.649,15.349 cw(c-9.008,14.99) -8.5,14.99 -8.5,11.911 ccw(c-7.992,11.91) -8.351,11.551 -5.949,9.149 ccw(c-5.59,9.508) -5.59,9 U2.11@-3.47,9
NetR55_2: R55.2 U2.13 | length 26.8
  Top Layer w0.2: R55.2@-12.8,29.7 -12.8,28.81 ccw(c-12.292,28.81) -12.651,28.451 -11.849,27.649 cw(c-12.208,27.29) -11.7,27.29 -11.7,24.31 ccw(c-11.192,24.31) -11.551,23.951 -11.049,23.449 cw(c-11.408,23.09) -10.9,23.09 -10.9,20.11 ccw(c-10.392,20.11) -10.751,19.751 -10.249,19.249 cw(c-10.608,18.89) -10.1,18.89 -10.1,15.91 ccw(c-9.592,15.91) -9.951,15.551 -9.449,15.049 cw(c-9.808,14.69) -9.3,14.69 -9.3,11.61 ccw(c-8.792,11.61) -9.151,11.251 -6.049,8.149 ccw(c-5.69,8.508) -5.69,8 U2.13@-3.47,8
NetR56_2: R56.2 U2.15 | length 23.3
  Top Layer w0.2: R56.2@-12.8,25.1 -12.8,24.21 ccw(c-12.292,24.21) -12.651,23.851 -11.849,23.049 cw(c-12.208,22.69) -11.7,22.69 -11.7,19.71 ccw(c-11.192,19.71) -11.551,19.351 -11.049,18.849 cw(c-11.408,18.49) -10.9,18.49 -10.9,15.51 ccw(c-10.392,15.51) -10.751,15.151 -10.249,14.649 cw(c-10.608,14.29) -10.1,14.29 -10.1,11.31 ccw(c-9.592,11.31) -9.951,10.951 -6.149,7.149 ccw(c-5.79,7.508) -5.79,7 U2.15@-3.47,7
NetR57_2: R57.2 U2.17 | length 19.8
  Top Layer w0.2: R57.2@-12.8,20.5 -12.8,19.61 ccw(c-12.292,19.61) -12.651,19.251 -11.849,18.449 cw(c-12.208,18.09) -11.7,18.09 -11.7,15.11 ccw(c-11.192,15.11) -11.551,14.751 -11.049,14.249 cw(c-11.408,13.89) -10.9,13.89 -10.9,10.91 ccw(c-10.392,10.91) -10.751,10.551 -6.349,6.149 ccw(c-5.99,6.508) -5.99,6 U2.17@-3.47,6
NetR58_2: R58.2 U2.19 | length 16.4
  Top Layer w0.2: R58.2@-12.8,15.9 -12.8,15.01 ccw(c-12.292,15.01) -12.651,14.651 -11.849,13.849 cw(c-12.208,13.49) -11.7,13.49 -11.7,10.51 ccw(c-11.192,10.51) -11.551,10.151 -6.549,5.149 ccw(c-6.19,5.508) -6.19,5 U2.19@-3.47,5
NetR59_2: R59.2 U2.21 | length 13
  Top Layer w0.2: R59.2@-12.8,11.3 -12.8,10.41 ccw(c-12.292,10.41) -12.651,10.051 -6.749,4.149 ccw(c-6.39,4.508) -6.39,4 U2.21@-3.47,4
NetR60_2: R60.2 U2.23 | length 10.8
  Top Layer w0.2: R60.2@-12.8,6.75 -10.76,6.75 cw(c-10.76,6.242) -10.401,6.601 -6.949,3.149 ccw(c-6.59,3.508) -6.59,3 U2.23@-3.47,3
NetR61_2: R61.2 U2.25 | length 15.3
  Top Layer w0.2: R61.2@-11.2,3.7 -9.342,3.7 cw(c-9.342,2.151) -8.246,3.246 ; -8.246,3.246 -7.4,2.4 ccw(c-6.676,3.124) -6.676,2.1 -2.31,2.1 ccw(c-2.31,2.608) -1.951,2.249 -1.849,2.351 cw(c-1.49,1.992) -1.49,2.5 U2.25@3.44,2.5
NetR62_2: R62.2 U2.26 | length 18.2
  Top Layer w0.2: R62.2@-11.2,2.1 -8.083,2.1 cw(c-8.083,1.417) -7.6,1.9 ccw(c-7.019,2.481) -7.019,1.659 -2.101,1.659 ccw(c-2.101,2.288) -1.657,1.843 -1.649,1.851 cw(c-1.29,1.492) -1.29,2 4.4,2 ccw(c4.4,2.4) 4.8,2.4 4.8,2.6 ccw(c4.4,2.6) 4.4,3 U2.26@3.47,3
NetR63_2: R63.2 U3.3 | length 37.6
  Top Layer w0.2: U3.3@3.47,36.9 4.69,36.9 cw(c4.69,36.392) 5.049,36.751 6.751,35.049 cw(c6.392,34.69) 6.9,34.69 6.9,31.71 ccw(c7.408,31.71) 7.049,31.351 7.551,30.849 cw(c7.192,30.49) 7.7,30.49 7.7,27.31 ccw(c8.208,27.31) 7.849,26.951 8.351,26.449 cw(c7.992,26.09) 8.5,26.09 8.5,23.01 ccw(c9.008,23.01) 8.649,22.651 9.151,22.149 cw(c8.792,21.79) 9.3,21.79 9.3,18.71 ccw(c9.808,18.71) 9.449,18.351 9.951,17.849 cw(c9.592,17.49) 10.1,17.49 10.1,14.51 ccw(c10.608,14.51) 10.249,14.151 10.751,13.649 cw(c10.392,13.29) 10.9,13.29 10.9,10.31 ccw(c11.408,10.31) 11.049,9.951 11.551,9.449 cw(c11.192,9.09) 11.7,9.09 11.7,6.111 ccw(c12.208,6.111) 11.849,5.751 12.651,4.949 cw(c12.292,4.59) 12.8,4.59 R63.2@12.8,3.7
NetR64_2: R64.2 U3.5 | length 34.1
  Top Layer w0.2: U3.5@3.47,37.9 4.89,37.9 cw(c4.89,37.392) 5.249,37.751 7.551,35.449 cw(c7.192,35.09) 7.7,35.09 7.7,31.91 ccw(c8.208,31.91) 7.849,31.551 8.351,31.049 cw(c7.992,30.69) 8.5,30.69 8.5,27.61 ccw(c9.008,27.61) 8.649,27.251 9.151,26.749 cw(c8.792,26.39) 9.3,26.39 9.3,23.31 ccw(c9.808,23.31) 9.449,22.951 9.951,22.449 cw(c9.592,22.09) 10.1,22.09 10.1,19.11 ccw(c10.608,19.11) 10.249,18.751 10.751,18.249 cw(c10.392,17.89) 10.9,17.89 10.9,14.91 ccw(c11.408,14.91) 11.049,14.551 11.551,14.049 cw(c11.192,13.69) 11.7,13.69 11.7,10.711 ccw(c12.208,10.711) 11.849,10.351 12.651,9.549 cw(c12.292,9.19) 12.8,9.19 R64.2@12.8,8.3
NetR65_2: R65.2 U3.7 | length 30.6
  Top Layer w0.2: U3.7@3.47,38.9 4.89,38.9 cw(c4.89,38.392) 5.249,38.751 8.351,35.649 cw(c7.992,35.29) 8.5,35.29 8.5,32.21 ccw(c9.008,32.21) 8.649,31.851 9.151,31.349 cw(c8.792,30.99) 9.3,30.99 9.3,27.91 ccw(c9.808,27.91) 9.449,27.551 9.951,27.049 cw(c9.592,26.69) 10.1,26.69 10.1,23.71 ccw(c10.608,23.71) 10.249,23.351 10.751,22.849 cw(c10.392,22.49) 10.9,22.49 10.9,19.51 ccw(c11.408,19.51) 11.049,19.151 11.551,18.649 cw(c11.192,18.29) 11.7,18.29 11.7,15.311 ccw(c12.208,15.311) 11.849,14.951 12.651,14.149 cw(c12.292,13.79) 12.8,13.79 R65.2@12.8,12.9
NetR66_2: R66.2 U3.9 | length 27.1
  Top Layer w0.2: U3.9@3.47,39.9 4.99,39.9 cw(c4.99,39.392) 5.349,39.751 9.151,35.949 cw(c8.792,35.59) 9.3,35.59 9.3,32.51 ccw(c9.808,32.51) 9.449,32.151 9.951,31.649 cw(c9.592,31.29) 10.1,31.29 10.1,28.31 ccw(c10.608,28.31) 10.249,27.951 10.751,27.449 cw(c10.392,27.09) 10.9,27.09 10.9,24.11 ccw(c11.408,24.11) 11.049,23.751 11.551,23.249 cw(c11.192,22.89) 11.7,22.89 11.7,19.911 ccw(c12.208,19.911) 11.849,19.551 12.651,18.749 cw(c12.292,18.39) 12.8,18.39 R66.2@12.8,17.5
NetR67_2: R67.2 U3.11 | length 23.6
  Top Layer w0.2: U3.11@3.47,40.9 5.09,40.9 cw(c5.09,40.392) 5.449,40.751 9.951,36.249 cw(c9.592,35.89) 10.1,35.89 10.1,32.91 ccw(c10.608,32.91) 10.249,32.551 10.751,32.049 cw(c10.392,31.69) 10.9,31.69 10.9,28.71 ccw(c11.408,28.71) 11.049,28.351 11.551,27.849 cw(c11.192,27.49) 11.7,27.49 11.7,24.51 ccw(c12.208,24.51) 11.849,24.151 12.651,23.349 cw(c12.292,22.99) 12.8,22.99 R67.2@12.8,22.1
NetR68_2: R68.2 U3.13 | length 20.1
  Top Layer w0.2: U3.13@3.47,41.9 5.29,41.9 cw(c5.29,41.392) 5.649,41.751 10.751,36.649 cw(c10.392,36.29) 10.9,36.29 10.9,33.31 ccw(c11.408,33.31) 11.049,32.951 11.551,32.449 cw(c11.192,32.09) 11.7,32.09 11.7,29.11 ccw(c12.208,29.11) 11.849,28.751 12.651,27.949 cw(c12.292,27.59) 12.8,27.59 R68.2@12.8,26.7
NetR69_2: R69.2 U3.15 | length 16.7
  Top Layer w0.2: U3.15@3.47,42.9 5.49,42.9 cw(c5.49,42.392) 5.849,42.751 11.551,37.049 cw(c11.192,36.69) 11.7,36.69 11.7,33.71 ccw(c12.208,33.71) 11.849,33.351 12.651,32.549 cw(c12.292,32.19) 12.8,32.19 R69.2@12.8,31.3
NetR70_2: R70.2 U3.17 | length 13.2
  Top Layer w0.2: U3.17@3.47,43.9 5.69,43.9 cw(c5.69,43.392) 6.049,43.751 12.651,37.149 cw(c12.292,36.79) 12.8,36.79 R70.2@12.8,35.9
NetR71_2: R71.2 U3.19 | length 11.1
  Top Layer w0.2: U3.19@3.47,44.9 5.89,44.9 cw(c5.89,44.392) 6.249,44.751 10.351,40.649 ccw(c10.71,41.008) 10.71,40.5 R71.2@12.8,40.5
NetR72_2: R72.2 U3.21 | length 9.6
  Top Layer w0.2: U3.21@3.47,45.9 6.09,45.9 11.789,45.9 cw(c11.789,45.392) 12.149,45.751 R72.2@12.8,45.1
NetR73_2: R73.2 U3.23 | length 10.4
  Top Layer w0.2: U3.23@3.47,46.9 9.839,46.9 ccw(c9.839,47.408) 10.199,47.049 R73.2@12.8,49.65
NetR74_2: R74.2 U3.25 | length 19
  Top Layer w0.2: U3.25@-3.44,47.4 1.59,47.4 ccw(c1.59,47.908) 1.949,47.549 2.151,47.751 cw(c2.51,47.392) 2.51,47.9 6.189,47.9 ccw(c6.189,48.408) 6.549,48.049 R74.2@12.8,54.3
NetR75_2: R75.2 U3.26 | length 22.5
  Top Layer w0.2: U3.26@-3.47,46.9 -4.4,46.9 cw(c-4.4,47.3) -4.8,47.3 -4.8,47.5 cw(c-4.4,47.5) -4.4,47.9 1.29,47.9 ccw(c1.29,48.408) 1.649,48.049 1.851,48.251 cw(c2.21,47.892) 2.21,48.4 4.889,48.4 ccw(c4.889,48.908) 5.249,48.549 R75.2@12.5,55.8
NetR79_1: R79.1 R87.1 R89.1 U5.14 | length 11.9
  Top Layer w0.4: U5.14@7,68.325 7,72.768 cw(c7.732,72.768) 7.732,73.5 R89.1@8.3,73.5
  Top Layer w0.5: R79.1@8.3,71.8 R89.1@8.3,73.5 9.172,73.5 ccw(c9.172,74.178) 9.85,74.178 R87.1@9.85,76.325
NetR80_1: R80.1 R81.1 R84.1 U5.13 | length 14.7
  Top Layer w0.4: R84.1@5.2,73.5 4.632,73.5 ccw(c4.632,72.768) 3.9,72.768 3.9,68.325 ccw(c4.55,68.325) 4.55,67.675 U5.13@6.6,67.675
  Top Layer w0.5: R80.1@5.2,71.8 R84.1@5.2,73.5 5.378,73.5 ccw(c5.378,74.872) 6.75,74.872 R81.1@6.75,76.325
NetR82_1: R82.1 R90.2 U2.46 | length 3.5
  Top Layer w0.25: U2.46@3.47,13 4.579,13 ccw(c4.579,14.016) 5.297,13.298 R82.1@5.5,13.5
  Top Layer w0.5: R82.1@5.5,13.5 R90.2@6.8,13.5
NetR82_2: R82.2 U2.45 | length 2.2
  Top Layer w0.25: U2.45@3.47,12.5 4.479,12.5 cw(c4.479,11.484) 5.197,12.202 R82.2@5.5,11.9
NetR83_1: R83.1 R91.2 U3.46 | length 3.5
  Top Layer w0.25: R83.1@-5.5,36.4 -5.297,36.602 cw(c-4.579,35.884) -4.579,36.9 U3.46@-3.47,36.9
  Top Layer w0.5: R91.2@-6.8,36.4 R83.1@-5.5,36.4
NetR83_2: R83.2 U3.45 | length 2.2
  Top Layer w0.25: R83.2@-5.5,38 -5.197,37.698 ccw(c-4.479,38.416) -4.479,37.4 U3.45@-3.47,37.4
NetR98_2: R98.2 SW1.3 SW1.4 | length 5.9
  Top Layer w0.6: R98.2@-12.876,77.711 cw(c-12.612,77.711) -12.612,77.975 SW1.3@-11.075,77.975 SW1.4@-11.075,74.025
NetR101_2: R101.2 U5.2 | length 10
  Top Layer w0.4: v1(-2.31,60.825) R101.2@-1.5,60.825 ; v1(-0.635,67.675) U5.2@1,67.675 U5.2@1.041,67.675
  Bottom Layer w0.25: v1(-2.31,60.825) -1.089,62.046 ccw(c-2.184,63.142) -0.635,63.142 v1(-0.635,67.675)
NetR102_1: pad.*@25.95,70.8 R102.1 R109.2 | length 9.2
  Top Layer w0.4: R102.1@13.4,66.2 17.355,66.2 ccw(c17.355,67.345) 18.5,67.345 R109.2@18.5,70.8
NetR106_2: R106.2 U8.13 | length 16.4
  Top Layer w0.25: v1(0.1,63.065) 0.336,62.829 cw(c-1.085,61.407) 0.925,61.407 U8.13@0.925,59.275
  Top Layer w0.4: v1(-4.7,72.765) R106.2@-4.7,73.5
  Bottom Layer w0.25: v1(-4.7,72.765) -0.439,68.504 cw(c-1.74,67.203) 0.1,67.203 v1(0.1,63.065)
SCK: U3.42 U8.39 | length 17
  Top Layer w0.25: U8.39@-3.575,50.625 v1(-3.575,52.025) ; U3.42@-3.47,38.9 v1(-1.635,38.9)
  Bottom Layer w0.25: v1(-3.575,52.025) -3.575,42.707 ccw(c-1.082,42.707) -2.845,40.945 -1.784,39.884 cw(c-2.143,39.525) -1.635,39.525 v1(-1.635,38.9)
SCL: R80.2 U8.21 | length 18
  Top Layer w0.25: v1(-3.075,57.875) U8.21@-3.075,59.275
  Top Layer w0.4: R80.2@5.2,70.2 v1(5.935,70.2)
  Bottom Layer w0.25: v1(-3.075,57.875) -3.075,58.12 cw(c-0.507,58.12) -2.323,59.935 5.194,67.452 ccw(c3.406,69.241) 5.935,69.241 v1(5.935,70.2)
SDA: R79.2 U8.22 | length 21.4
  Top Layer w0.25: v1@-3.575,57.26 v1(-3.575,57.275) U8.22@-3.575,59.275
  Top Layer w0.4: R79.2@8.3,70.2 v1(9.035,70.2)
  Bottom Layer w0.25: v1(-3.575,57.275) -3.108,57.275 -2.978,57.275 ccw(c-2.978,57.783) -2.47,57.783 -2.47,58.29 cw(c-0.441,58.29) -1.876,59.724 8.292,69.892 cw(c9.035,69.149) v1(9.035,70.2)
SWCLK: J10.1 U8.37 | length 5.1
  Top Layer w0.2: J10.1@-9.5,49.8 cw(c-7.508,47.808) -7.508,50.625 U8.37@-4.575,50.625
SWDIO: J10.2 U8.34 | length 4.1
  Top Layer w0.2: J10.2@-9.5,52.34 -9.5,52.49 cw(c-8.992,52.49) -9.351,52.849 -8.884,53.316 cw(c-8.199,52.632) -8.199,53.6 -7.61,53.6 cw(c-7.61,53.092) -7.251,53.451 -7.1,53.3 ccw(c-6.859,53.541) -6.859,53.2 U8.34@-6.15,53.2
Vb+: C1.2 pad.*@-27.2,58.1 Q1.2 Q28.2 R26.1 R98.1 R104.2 U1.2 U2.1 U?.2 | length 102.1
  Top Layer w0.2: R26.1@-15.7,55.8 -15.557,55.943 R26.1@-15.342,56.158 ; Q28.2@-14.1,57.15 -13.57,57.15 cw(c-13.57,55.28) -11.7,55.28 -11.7,51.91 ccw(c-11.192,51.91) -11.551,51.551 -11.049,51.049 cw(c-11.408,50.689) -10.9,50.689 -10.9,47.71 ccw(c-10.392,47.71) -10.751,47.351 -10.249,46.849 cw(c-10.608,46.489) -10.1,46.489 -10.1,43.51 ccw(c-9.592,43.51) -9.951,43.151 -9.449,42.649 cw(c-9.808,42.289) -9.3,42.289 -9.3,39.21 ccw(c-8.792,39.21) -9.151,38.851 -8.649,38.349 cw(c-9.008,37.99) -8.5,37.99 -8.5,34.91 ccw(c-7.992,34.91) -8.351,34.551 -7.849,34.049 cw(c-8.208,33.69) -7.7,33.69 -7.7,30.61 ccw(c-7.192,30.61) -7.551,30.251 -7.049,29.749 cw(c-7.408,29.39) -6.9,29.39 -6.9,26.31 ccw(c-6.392,26.31) -6.751,25.951 -6.249,25.449 cw(c-6.608,25.09) -6.1,25.09 -6.1,22.01 ccw(c-5.592,22.01) -5.951,21.651 -5.449,21.149 cw(c-5.808,20.79) -5.3,20.79 -5.3,17.711 ccw(c-4.792,17.71) -5.151,17.351 -4.649,16.849 cw(c-5.008,16.49) -4.5,16.49 -4.5,14.158 ccw(c-4.342,14.158) -4.342,14 U2.1@-3.47,14
  Top Layer w0.4: C1.2@-26.54,72.85 C1.2@-26.1,72.85 -25.614,73.336 cw(c-25.255,72.977) -25.255,73.485 U1.2@-23.275,73.485
  Top Layer w0.6: C1.2@-26.899,72.701 cw(c-26.54,72.342) C1.2@-26.54,72.85 ; R98.1@-16,77.975 -26.525,77.975 ccw(c-26.525,76.5) -28,76.5 -28,58.1 pad.*@-27.2,58.1 ; Q1.2@-15.7,54.45 R26.1@-15.7,55.8 ; R26.1@-15.629,55.9 -22.912,55.9 cw(c-22.912,56.412) -23.424,56.412 R104.2@-23.424,58.1 pad.*@-27.2,58.1 ; R26.1@-15.557,55.756 -15.557,55.943 -15.557,56.233 cw(c-15.049,56.233) -15.408,56.592 -14.999,57.001 cw(c-14.64,56.642) -14.64,57.15 Q28.2@-14.1,57.15 ; pad.*@-27.2,58.1 ccw(c-21.647,63.653) -27.196,58.096 pad.*@-27.2,58.1
VEN_SNS: R101.1 U8.14 | length 1.6
  Top Layer w0.3: R101.1@0.1,60.825 cw(c-0.684,60.041) 0.425,60.041 U8.14@0.425,59.275
Vreg: C41.2 J8.1 U5.7 | length 9.9
  Top Layer w0.3: U5.7@1,64.425 ccw(c2.496,64.425) 1.438,63.367 J8.1@2.53,62.275 2.53,61.284 ccw(c3.547,61.284) 3.547,60.267 6.167,60.267 ccw(c6.167,61.1) 7,61.1 C41.2@7,61.8
pads on no net: U1.6 U2.27 U2.28 U2.32 U2.33 U2.38 U2.41 U2.42 U2.43 U2.44 U3.27 U3.28 U3.38 U8.2 U8.3 U8.4 U8.5 U8.6 U8.10 U8.11 U8.12 U8.15 U8.16 U8.17 U8.18 U8.19 U8.20 U8.27 U8.28 U8.29 U8.30 U8.31 U8.42 U8.43 U8.45 U8.46

## Polygon pours and split planes (outlines as drawn)
GND on Top Layer "NONET_L02_P-001" (solid, remove dead copper, pour order 2): -10.4,49.6 ccw(c-9.6,49.6) -9.6,48.8 2.158,48.8 ccw(c2.158,50.349) 3.254,49.254 9.946,55.946 ccw(c8.851,57.042) 10.4,57.042 10.4,79.6 -6.3,79.6 -6.3,69.642 ccw(c-4.751,69.642) -5.846,68.546 -5.554,68.254 cw(c-6.649,67.158) -5.1,67.158 -5.1,65.042 cw(c-6.649,65.042) -5.554,63.946 -9.946,59.554 ccw(c-8.851,58.458) -10.4,58.458
GND on Top Layer "NONET_L02_P-001" (solid, remove dead copper, pour order 1): -27.5,68.558 ccw(c-26.377,68.558) -26.377,67.435 -20.649,67.435 ccw(c-20.649,68.985) -19.1,68.985 -19.1,75.751 ccw(c-20.649,75.751) -20.649,77.3 -21.855,77.3 -26.4,77.3 ccw(c-26.4,76.2) -27.5,76.2
GND on Bottom Layer "NONET_L02_P-001" (solid, remove dead copper, pour order 0): -32.2,89.1 -32.2,-5.4 29.7,-5.4 29.7,89.1

## Keep-outs
Keep-Out Layer:
  the board outline again, w0

## Other copper
Top Layer:
  rectangle net Vb+: -28.1,72.1 -26,73.6
  rectangle net NetR102_1: 16.3,68.1 26.8,73.5
  region net NetQ2_2: -24.1,54.85 -27.6,54.85 -27.6,52.15 -24.1,52.15
  region net NetQ3_2: -24.1,50.25 -27.6,50.25 -27.6,47.55 -24.1,47.55
  region net NetQ4_2: -24.1,45.65 -27.6,45.65 -27.6,42.95 -24.1,42.95
  region net NetQ7_2: -24.1,31.85 -27.6,31.85 -27.6,29.15 -24.1,29.15
  region net NetQ6_2: -24.1,36.45 -27.6,36.45 -27.6,33.75 -24.1,33.75
  region net NetQ5_2: -24.1,41.05 -27.6,41.05 -27.6,38.35 -24.1,38.35
  region net NetQ10_2: -24.1,18.05 -27.6,18.05 -27.6,15.35 -24.1,15.35
  region net NetQ9_2: -24.1,22.65 -27.6,22.65 -27.6,19.95 -24.1,19.95
  region net NetQ8_2: -24.1,27.25 -27.6,27.25 -27.6,24.55 -24.1,24.55
  region net MGND: -24.1,4.25 -27.6,4.25 -27.6,1.55 -24.1,1.55
  region net NetQ12_2: -24.1,8.85 -27.6,8.85 -27.6,6.15 -24.1,6.15
  region net NetQ11_2: -24.1,13.45 -27.6,13.45 -27.6,10.75 -24.1,10.75
  rectangle net NetQ23_2: 24.1,42.95 27.6,45.65
  rectangle net NetQ24_2: 24.1,47.55 27.6,50.25
  rectangle net GND: 24.1,52.15 27.6,54.85
  rectangle net NetQ20_2: 24.1,29.15 27.6,31.85
  rectangle net NetQ21_2: 24.1,33.75 27.6,36.45
  rectangle net NetQ22_2: 24.1,38.35 27.6,41.05
  rectangle net NetQ17_2: 24.1,15.35 27.6,18.05
  rectangle net NetQ18_2: 24.1,19.95 27.6,22.65
  rectangle net NetQ19_2: 24.1,24.55 27.6,27.25
  rectangle net NetQ16_2: 24.1,10.75 27.6,13.45
  rectangle net NetQ15_2: 24.1,6.15 27.6,8.85
  rectangle net NetQ14_2: 24.1,1.55 27.6,4.25
  region net 5V: -24,67.2 -26.2,67.2 ccw(c-26.2,66.8) -26.6,66.8 -26.6,66 ccw(c-26.3,66) -26.3,65.7 -24,65.7
  region net GND: 16.3,57.3 27.155,57.3 ccw(c27.155,58.545) 28.4,58.545 28.4,64.2 ccw(c27.8,64.2) 27.8,64.8 23.9,64.8 ccw(c23.9,63.9) 23,63.9 cw(c21.8,63.9) 21.8,62.7 16.3,62.7
  region net NetR102_1: 16.3,73.5 27.155,73.5 cw(c27.155,72.255) 28.4,72.255 28.4,66.6 cw(c27.8,66.6) 27.8,66 23.9,66 cw(c23.9,66.9) 23,66.9 ccw(c21.8,66.9) 21.8,68.1 16.3,68.1
Bottom Layer:
  region net 5V: -23.325,66.6 -24.458,66.6 ccw(c-24.458,65.051) -25.554,66.146 -25.8,65.9 cw(c-26.283,66.383) -26.283,65.7 -26.3,65.7 cw(c-26.3,66.1) -26.7,66.1 -26.7,66.8 cw(c-26.3,66.8) -26.3,67.2 -23.325,67.2

## Silkscreen, mask and mechanical layers (free items; w line width, h text height)
Top Overlay:
  text "24" at -27.866,60 h0.8
  text "23" at -27.866,55.4 h0.8
  text "0" at 26.933,55.4 h0.8
  text "22" at -27.866,50.8 h0.8
  text "1" at 27.067,50.8 h0.8
  text "21" at -27.733,46.2 h0.8
  text "2" at 26.933,46.2 h0.8
  text "20" at -27.866,41.6 h0.8
  text "3" at 26.933,41.6 h0.8
  text "19" at -27.8,37 h0.8
  text "4" at 26.933,37 h0.8
  text "18" at -27.8,32.4 h0.8
  text "5" at 26.933,32.4 h0.8
  text "16" at -27.8,27.8 h0.8
  text "6" at 26.933,27.8 h0.8
  text "17" at -27.8,23.2 h0.8
  text "7" at 26.933,23.2 h0.8
  text "15" at -27.8,18.6 h0.8
  text "8" at 26.933,18.6 h0.8
  text "14" at -27.8,14 h0.8
  text "9" at 26.933,14 h0.8
  text "13" at -27.8,9.4 h0.8
  text "10" at 26.6,9.4 h0.8
  text "12" at -27.8,4.8 h0.8
  text "11" at 26.733,4.8 h0.8
Top Solder:
  region: 23.354,59.137 23.354,64.454 cw(c23.7,64.454) 23.7,64.8 27.8,64.8 cw(c27.8,64.2) 28.4,64.2 28.4,59.1 23.4,59.1
  region: 23.354,71.663 23.354,66.346 ccw(c23.7,66.346) 23.7,66 27.8,66 ccw(c27.8,66.6) 28.4,66.6 28.4,71.7 23.4,71.7